# Altium PCB PCB_2021-02-06_18-04-57_2021-03-03.pcbdoc
Units mil, origin at the board's own origin, x right, y up, seen from the top; angles counter-clockwise.
Board outline 4600 x 3397 mil, 2 copper layers (Top Layer, Bottom Layer); 78 components, 121 nets, 480 pads, 290 vias.
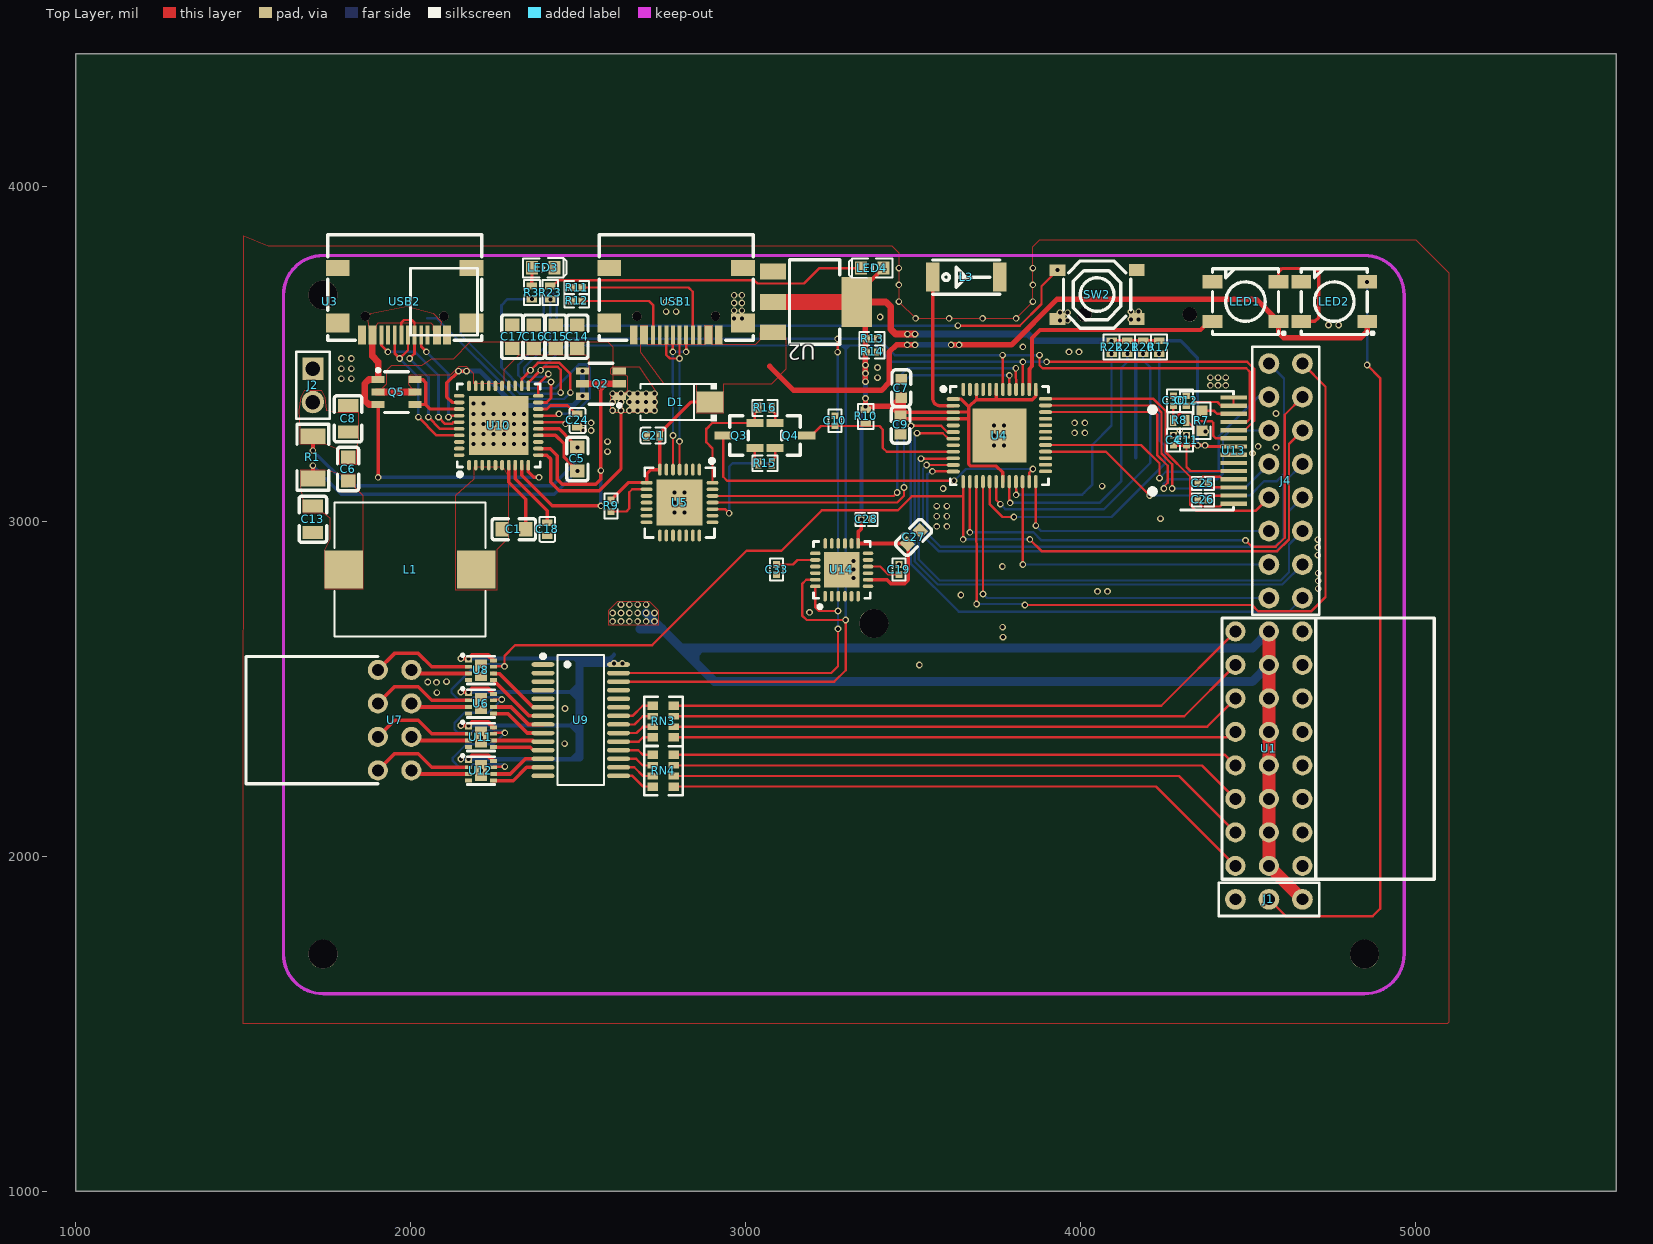
[diagram p0: Top Layer view]
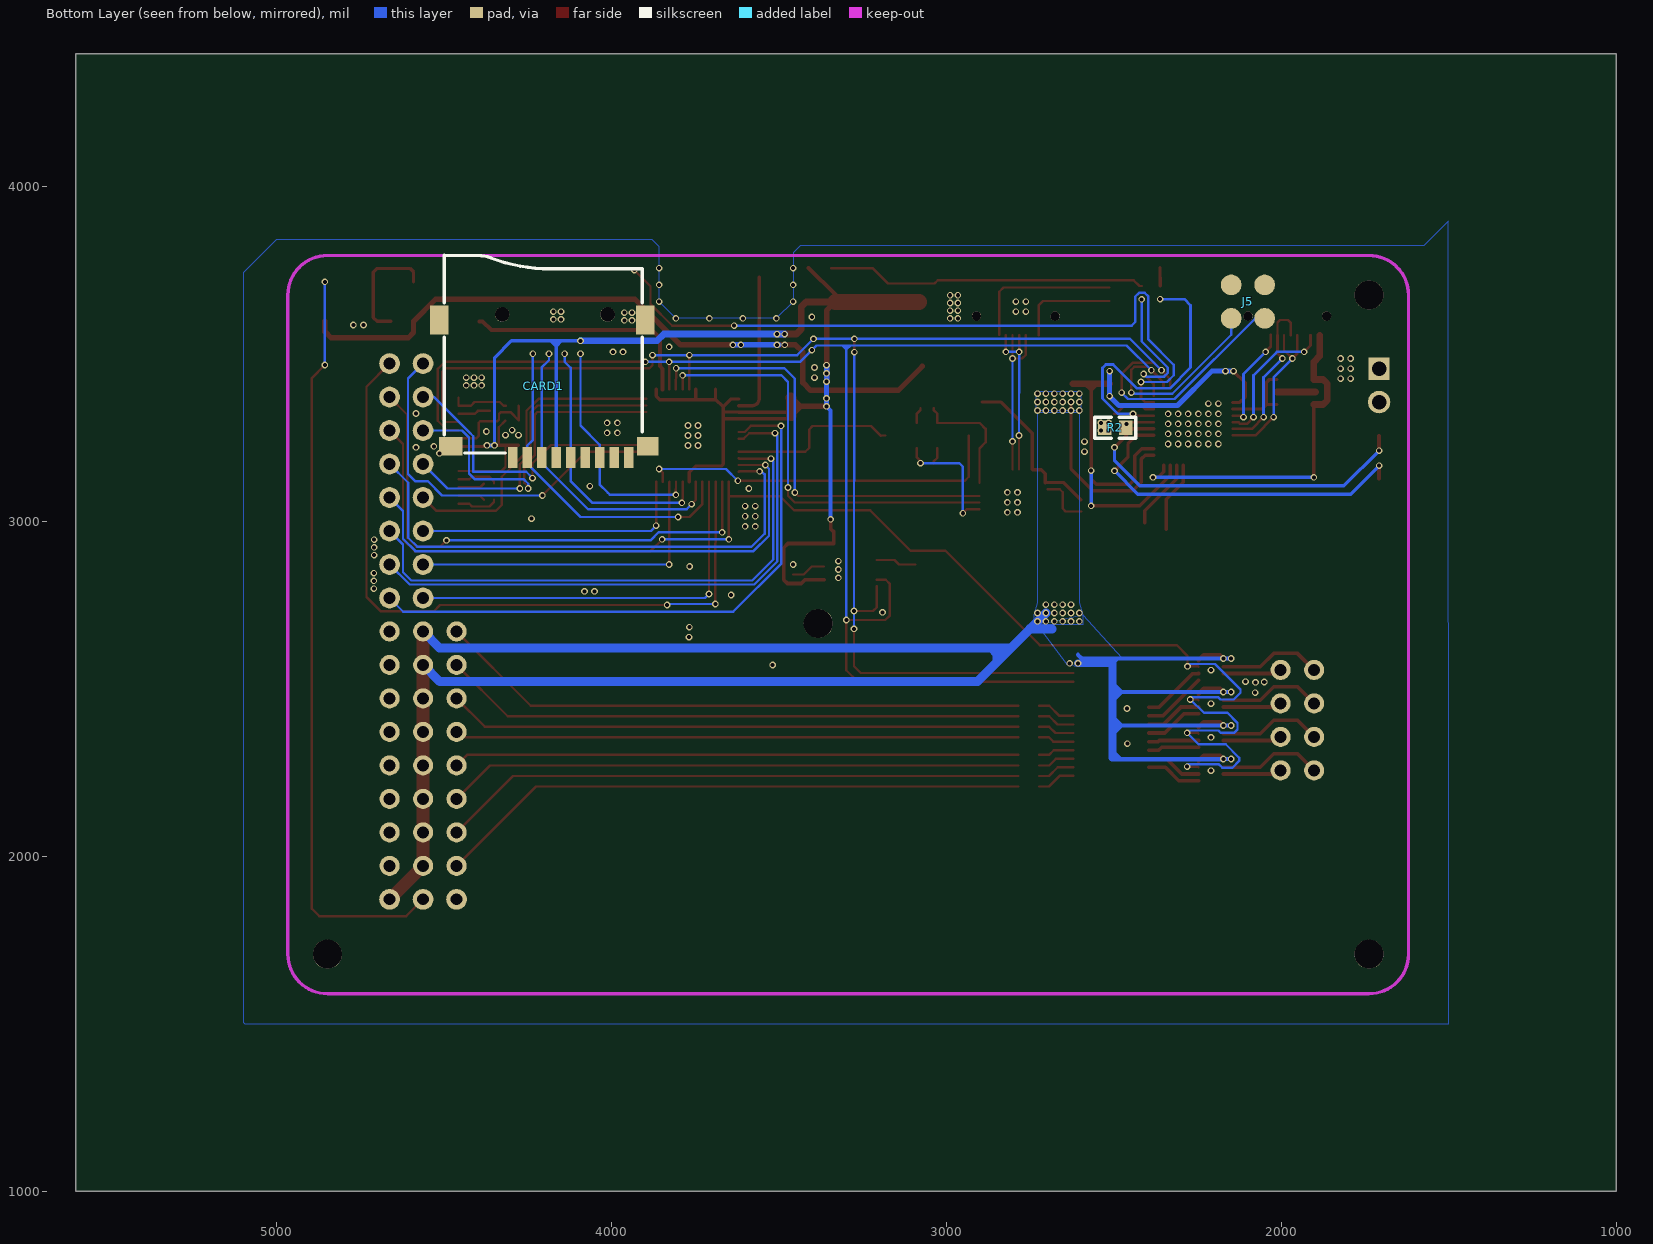
[diagram p1: Bottom Layer view, seen from below]

## Layer stack, top to bottom
Top Layer: signal copper (thickness not stored)
Dielectric: dielectric 12.6, FR-4, Dk 4.8
Bottom Layer: signal copper (thickness not stored)

## Board outline
5600,1000 1000,1000 1000,4397 5600,4397

## Components (designator, comment, footprint, x,y, rotation, side; value= is the part's Value field where it differs from the comment)
C1 "0.1u" C0603#1 2308,2977 r180 top
C4 "0.1uF" C0402#1 4278,3243 r90 top
C5 "10u" C0603#1 2498,3187 r270 top
C6 "0.1u" C0603#1 1813,3157 r270 top
C7 "0.1uF" C0603#2 3465,3398 r270 top
C8 "22u" C0805 1813,3307 r270 top
C9 "10uF" C0603#2 3463,3289 r90 top
C10 "0.1uF" C0402#1 3267,3301 r270 top
C11 "10μF/16V" C0402#1 4317,3243 r90 top
C12 "10.μF/16V" C0402#1 4316,3361 r270 top
C13 "22u" C0805 1708,3007 r90 top
C14 "22uF" C0603#1 2498,3552 r270 top
C15 "22uF" C0603#1 2433,3552 r270 top
C16 "22uF" C0603#1 2368,3552 r270 top
C17 "22uF" C0603#1 2303,3552 r270 top
C18 "1uF" C0402#2 2408,2977 r270 top
C19 "100nF" C0402#1 3458,2857 r90 top
C21 "10uF" C0402#2 2724,3257 r0 top
C24 "1uF" C0402#2 2498,3302 r270 top
C25 "1μF/50V" C0402#1 4366,3114 r0 top
C26 "1μF/50V" C0402#1 4366,3065 r180 top
C27 "100nF" C0603#2 3502,2953 r45 top
C28 "100nF" C0402#1 3361,3007 r180 top
C30 "4.7μF/16V" C0402#1 4278,3361 r270 top
C33 "2.2nF" C0402#1 3093,2857 r90 top
CARD1 "TF-15×15" TF-SMD_TF-15-15 4203,3397 r270 bottom
D1 "SS34_C83961" SMA_L4.4-W2.8-LS5.4-RD 2793,3357 r180 top
J1 "HDR-M-2.54_1x3" HDR-M-2.54_1X3 4563,1872 r0 top
J2 "HDR-M-2.54_1x2" HDR-M-2.54_1X2 1708,3407 r270 top
J4 "HDR-M-2.54_2x8" HDR-M-2.54_2X8 4613,3122 r90 top
J5 "HDR-M-2.54_2x2" HDR-M-2.54_2X2 2099.73,3657 r0 top
L1 "2.2uH" IND-SMD_L11.5-W10.0_SMMS1040 1998,2857 r180 top
L3 "AN2051-245" ANT2051 3659,3730 r0 top
LED1 "WS2812C" LED-SMD_4P-L5.0-W5.0-TL 4493,3657 r180 top
LED2 "WS2812C" LED-SMD_4P-L5.0-W5.0-TL 4758,3657 r180 top
LED3 "LED-0603_R" LED0603_RED 2396,3758 r0 top
LED4 "LED-0603_R" LED0603_RED 3378,3757 r180 top
Q2 "SC8205S" SOT-23-6_L2.9-W1.6-P0.95-LS2.8-BR 2568,3412 r0 top
Q3 "S8050" SOT-23_L2.9-W1.3-P0.95-LS2.4-BR 2980.5,3257 r0 top
Q4 "S8050" SOT-23_L2.9-W1.3-P0.95-LS2.4-BR 3135.5,3257 r180 top
Q5 "SC8205S" SOT-23-6_L2.9-W1.6-P0.95-LS2.8-BR 1958,3387 r180 top
R1 "5mR" R1206 1708,3192 r270 top
R2 "AT103" R0603#1 2496,3280 r0 bottom
R3 "2K" R0402#1 2362,3684 r270 top
R7 "910k/1%" R0603#2 4363,3301 r90 top
R8 "4.7k/1%" R0402#1 4297,3302 r0 top
R9 "10k" R0402#2 2598.5,3047.2 r270 top
R10 "10K" R0402#1 3359,3314 r90 top
R11 "5.1K" R0402#2 2496,3699 r180 top
R12 "5.1K" R0402#2 2496,3659 r180 top
R13 "4.7k" R0402#2 3378,3546 r0 top
R14 "4.7k" R0402#2 3378,3507 r0 top
R15 "10K" R0402#1 3058,3174.5 r180 top
R16 "10K" R0402#1 3058,3339.5 r0 top
R17 "10K" R0402#1 4235,3521 r270 top
R20 "10K" R0402#1 4187,3521 r270 top
R21 "10K" R0402#1 4140,3521 r270 top
R22 "10K" R0402#1 4093,3521 r270 top
R23 "2K" R0402#1 2417,3684 r270 top
RN3 "220" RES-ARRAY-SMD_0603-8P-L3.2-W1.6-BL 2754.11,2403.1 r270 top
RN4 "220" RES-ARRAY-SMD_0603-8P-L3.2-W1.6-BL 2754.11,2256.1 r270 top
SW2 "金属按键" SW-SMD_4P-L5.1-W5.1-P3.70-LS6.5 4050,3678 r0 top
U1 "3x8p弯针" 3X8P弯针 4463,1972 r90 top
U2 "AMS1117-3.3_C498117" PG-SOT223-4_L6.5-W3.5-P2.30-LS7.0-BR 3207,3656 r180 top
U3 "Raink边框" RAINK 1758,3657 r0 top
U4 "ESP32-PICO-D4" QFN-48_L7.0-W7.0-P0.50-BL-EP4.1 3758,3257 r270 top
U5 "CP2102-GMR" QFN-28_L5.0-W5.0-P0.50-BL-EP 2803,3057 r180 top
U6 "DRV8838DSGR" WSON-8_L2.0-W2.0-P0.50-TL-EP 2210,2456 r0 top
U7 "2x4p弯针" 2X4P弯针 2002,2557 r270 top
U8 "DRV8838DSGR" WSON-8_L2.0-W2.0-P0.50-TL-EP 2210,2556 r0 top
U9 "PCA9685" TSSOP-28_L9.7-W4.4-P0.65-LS6.4-BL 2508,2407 r270 top
U10 "SW6106" QFN-40_L6.0-W6.0-P0.50-BL-EP4.5 2263,3287 r0 top
U11 "DRV8838DSGR" WSON-8_L2.0-W2.0-P0.50-TL-EP 2210,2356 r0 top
U12 "DRV8838DSGR" WSON-8_L2.0-W2.0-P0.50-TL-EP 2210,2256 r0 top
U13 "SSD1306-14Pin_0.91_JX" SSD1306-14PIN_0.91_JX 4418,3212 r90 top
U14 "MPU-6050_C24112" QFN-24_L4.0-W4.0-P0.50-BL-EP2.6 3287,2856 r0 top
USB1 "TYPEC-304S-ACP16" USB-C-SMD_TYPEC-304S-ACP16 2793,3657 r180 top
USB2 "TYPEC-304S-ACP16" USB-C-SMD_TYPEC-304S-ACP16 1982,3657 r180 top

## Footprints (in the part's own frame and the unit in brackets; to place one, negate y for a bottom-side part, rotate by r counter-clockwise, add the part's x,y. Pads: shape width x height; smd on the part's side, far side on the other; paste and mask are expansions set on the pad)
2X4P弯针 [mil]
  round 60 hole 36: 1(0,0) 2(0,-100) 3(100,0) 4(100,-100) 5(200,0) 6(200,-100) 7(300,0) 8(300,-100)
  silkscreen extent -40,-494 340,-100
3X8P弯针 [mil]
  round 60 hole 36: 1(0,0) 2(0,-100) 3(0,-200) 4(100,0) 5(100,-100) 6(100,-200) 7(200,0) 8(200,-100) 9(200,-200) 10(300,0) 11(300,-100) 12(300,-200) 13(400,0) 14(400,-100) 15(400,-200) 16(500,0) 17(500,-100) 18(500,-200) 19(600,0) 20(600,-100) 21(600,-200) 22(700,0) 23(700,-100) 24(700,-200)
  silkscreen extent -40,-594 740,40
ANT2051 [mm]
  rect 1x2.2 smd: 1(-2.54,0) 2(2.54,0)
  silkscreen extent -2.56,-1.3 2.55,1.3
C0402#1 [mm]
  rect 0.5x0.54 smd: 1(-0.381,0) 2(0.381,0)
  silkscreen extent -0.84,-0.48 0.84,0.5
C0402#2 [mm]
  rect 0.5x0.8 smd: 1(-0.5,0) 2(0.5,0)
  silkscreen extent -0.95,-0.6 0.95,0.6
C0603#1 [mm]
  rect 1x1.1 smd: 1(-0.9,0) 2(0.9,0)
  silkscreen extent -1.65,-0.8 1.65,0.8
C0603#2 [mm]
  rect 0.8x0.9 smd: 1(-0.7,0) 2(0.7,0)
  silkscreen extent -1.41,-0.71 1.39,0.72
C0805 [mm]
  rect 1x1.55 smd: 1(-1,0) 2(1,0)
  silkscreen extent -1.75,-1.04 1.75,1.04
HDR-M-2.54_1X2 [mm]
  rect 1.7x1.575 hole 1.1: 1(-1.27,0)
  round 1.7 hole 1.1: 2(1.27,0)
  silkscreen extent -2.54,-1.27 2.54,1.27
HDR-M-2.54_1X3 [mil]
  round 62 hole 35: 1(-100,0) 2(0,0) 3(100,0)
  silkscreen extent -150,-50 150,50
HDR-M-2.54_2X2 [mil]
  round 62 smd far side: 1(-50,50) 2(50,50) 3(-50,-50) 4(50,-50)
  silkscreen extent -100,-100 100,100
HDR-M-2.54_2X8 [mil]
  round 62 hole 35: 1(-350,-50) 2(-350,50) 3(-250,-50) 4(-250,50) 5(-150,-50) 6(-150,50) 7(-50,-50) 8(-50,50) 9(50,-50) 10(50,50) 11(150,-50) 12(150,50) 13(250,-50) 14(250,50) 15(350,-50) 16(350,50)
  silkscreen extent -400,-100 400,100
IND-SMD_L11.5-W10.0_SMMS1040 [mm]
  rect 2.924x2.92 smd: 1(5.028,0) 2(-5.028,0)
  silkscreen extent -5.73,-5.08 5.73,5.08
LED0603_RED [mm]
  rect 0.9x1 smd: 1(-0.85,0) 2(0.85,0)
  silkscreen extent -1.54,-0.73 1.75,0.73
LED-SMD_4P-L5.0-W5.0-TL [mm]
  rect 1.5x1 smd: 1(-2.5,1.5) 2(-2.5,-1.5) 3(2.5,-1.5) 4(2.5,1.5)
  silkscreen extent -3,-2.5 2.5,2.5
PG-SOT223-4_L6.5-W3.5-P2.30-LS7.0-BR [mm]
  rect 2x1.2 smd: 1(3.175,-2.3) 2(3.175,0) 3(3.175,2.3)
  rect 2.3x3.8 smd: 4(-3.175,0)
  silkscreen extent -1.87,-3.2 1.93,3.2
QFN-24_L4.0-W4.0-P0.50-BL-EP2.6 [mm]
  oval 0.28x0.8 smd: 1(-1.25,-2) 2(-0.75,-2) 3(-0.25,-2) 4(0.25,-2) 5(0.75,-2) 6(1.25,-2) 13(1.25,2) 14(0.75,2) 15(0.25,2) 16(-0.25,2) 17(-0.75,2) 18(-1.242,2)
  oval 0.8x0.28 smd: 7(2,-1.25) 8(2,-0.75) 9(2,-0.25) 10(2,0.25) 11(2,0.75) 12(2,1.25) 19(-2,1.25) 20(-2,0.75) 21(-2,0.25) 22(-2,-0.25) 23(-2,-0.75) 24(-2,-1.25)
  rect 2.7x2.7 smd: 25(0.013,0)
  silkscreen extent -2.14,-3.05 2.16,2.15
QFN-28_L5.0-W5.0-P0.50-BL-EP [mm]
  oval 0.28x0.9 smd: 1(-1.501,-2.5) 2(-1.001,-2.5) 3(-0.501,-2.5) 4(0,-2.5) 5(0.5,-2.5) 6(1.001,-2.5) 7(1.501,-2.5) 15(1.501,2.5) 16(1.001,2.5) 17(0.5,2.5) 18(0,2.5) 19(-0.501,2.5) 20(-1.001,2.5) 21(-1.501,2.5)
  oval 0.9x0.28 smd: 8(2.5,-1.501) 9(2.5,-1.001) 10(2.5,-0.5) 11(2.5,0) 12(2.5,0.5) 13(2.5,1.001) 14(2.5,1.501) 22(-2.5,1.501) 23(-2.5,1.001) 24(-2.5,0.5) 25(-2.5,0) 26(-2.5,-0.5) 27(-2.5,-1.001) 28(-2.5,-1.501)
  rect 3.5x3.5 smd: 29(0,0)
  silkscreen extent -2.65,-3.3 2.65,2.65
QFN-40_L6.0-W6.0-P0.50-BL-EP4.5 [mm]
  oval 0.28x0.8 smd: 1(-2.25,-3) 2(-1.75,-3) 3(-1.25,-3) 4(-0.75,-3) 5(-0.25,-3) 6(0.25,-3) 7(0.75,-3) 8(1.25,-3) 9(1.75,-3) 10(2.25,-3) 21(2.25,3) 22(1.75,3) 23(1.25,3) 24(0.75,3) 25(0.25,3) 26(-0.25,3) 27(-0.75,3) 28(-1.25,3) 29(-1.75,3) 30(-2.25,3)
  oval 0.8x0.28 smd: 11(3,-2.25) 12(3,-1.75) 13(3,-1.25) 14(3,-0.75) 15(3,-0.25) 16(3,0.25) 17(3,0.75) 18(3,1.25) 19(3,1.75) 20(3,2.25) 31(-3,2.25) 32(-3,1.75) 33(-3,1.25) 34(-3,0.75) 35(-3,0.25) 36(-3,-0.25) 37(-3,-0.75) 38(-3,-1.25) 39(-3,-1.75) 40(-3,-2.25)
  rect 4.5x4.5 smd: 41(0,0)
  silkscreen extent -3.15,-3.85 3.15,3.15
QFN-48_L7.0-W7.0-P0.50-BL-EP4.1 [mm]
  oval 0.28x1 smd: 1(-2.769,-3.5) 2(-2.268,-3.5) 3(-1.768,-3.5) 4(-1.268,-3.5) 5(-0.767,-3.5) 6(-0.267,-3.5) 7(0.231,-3.5) 8(0.731,-3.5) 9(1.232,-3.5) 10(1.732,-3.5) 11(2.233,-3.5) 12(2.733,-3.5) 25(2.718,3.5) 26(2.217,3.5) 27(1.717,3.5) 28(1.217,3.5) 29(0.716,3.5) 30(0.216,3.5) 31(-0.282,3.5) 32(-0.782,3.5) 33(-1.283,3.5) 34(-1.783,3.5) 35(-2.284,3.5) 36(-2.784,3.5)
  oval 1x0.28 smd: 13(3.5,-2.743) 14(3.5,-2.243) 15(3.5,-1.742) 16(3.5,-1.242) 17(3.5,-0.742) 18(3.5,-0.241) 19(3.5,0.257) 20(3.5,0.757) 21(3.5,1.257) 22(3.5,1.758) 23(3.5,2.258) 24(3.5,2.759) 37(-3.5,2.769) 38(-3.5,2.268) 39(-3.5,1.768) 40(-3.5,1.268) 41(-3.5,0.767) 42(-3.5,0.267) 43(-3.5,-0.231) 44(-3.5,-0.731) 45(-3.5,-1.232) 46(-3.5,-1.732) 47(-3.5,-2.233) 48(-3.5,-2.733)
  rect 4.1x4.1 smd: 49(0,0)
  silkscreen extent -3.73,-4.4 3.72,3.73
R0402#1 [mm]
  rect 0.5x0.8 smd: 1(-0.5,0) 2(0.5,0)
  silkscreen extent -0.95,-0.6 0.95,0.6
R0402#2 [mm]
  rect 0.566x0.54 smd: 1(-0.433,0) 2(0.433,0)
  silkscreen extent -0.94,-0.5 0.94,0.5
R0603#1 [mm]
  rect 1x1.1 smd: 1(0.8,0) 2(-0.8,0)
  silkscreen extent -1.55,-0.81 1.55,0.8
R0603#2 [mm]
  rect 0.806x0.864 smd: 1(-0.753,0) 2(0.753,0)
  silkscreen extent -1.39,-0.66 1.39,0.66
R1206 [mm]
  rect 1.2x1.9 smd: 1(-1.6,0) 2(1.6,0)
  silkscreen extent -2.5,-1.2 2.5,1.2
RAINK [mil]
  Keep-Out Layer lines w10: -137.8,-1948.82 -137.8,19.68 ; -19.68,-2066.93 3090.55,-2066.93 ; -19.68,137.8 3090.55,137.8 ; 3208.66,-1948.82 3208.66,19.68
  Keep-Out Layer lines w10: -137.8,-1948.82 ccw(c-19.69,-1948.82) -19.68,-2066.93 ; -137.8,19.68 cw(c-19.69,19.68) -19.68,137.79 ; 3090.55,-2066.93 ccw(c3090.55,-1948.82) 3208.66,-1948.82 ; 3090.55,137.8 cw(c3090.55,19.68) 3208.66,19.68
RES-ARRAY-SMD_0603-8P-L3.2-W1.6-BL [mm]
  rect 0.65x0.8 smd: 1(-1.2,-0.8) 4(1.2,-0.8) 5(1.2,0.8) 8(-1.2,0.8)
  rect 0.5x0.8 smd: 2(-0.4,-0.8) 3(0.4,-0.8) 6(0.4,0.8) 7(-0.4,0.8)
  silkscreen extent -1.87,-1.45 1.87,1.47
SMA_L4.4-W2.8-LS5.4-RD [mm]
  rect 2.046x1.62 smd: 1(-2.565,0) 2(2.565,0)
  silkscreen extent -3.08,-1.44 2.7,1.44
SOT-23-6_L2.9-W1.6-P0.95-LS2.8-BR [mm]
  rect 1x0.55 smd: 1(1.4,-0.95) 2(1.4,0) 3(1.4,0.95) 4(-1.4,0.95) 5(-1.4,0) 6(-1.4,-0.95)
  silkscreen extent -0.9,-1.78 1.52,1.55
SOT-23_L2.9-W1.3-P0.95-LS2.4-BR [mm]
  rect 1.3x0.6 smd: 1(1.2,-0.95) 2(1.2,0.95) 3(-1.2,0)
  silkscreen extent -0.7,-1.5 0.7,1.5
SSD1306-14PIN_0.91_JX [mm]
  rect 0.32x2 smd: 1(-4.03,-1) 2(-3.41,-1) 3(-2.79,-1) 4(-2.17,-1) 5(-1.55,-1) 6(-0.93,-1) 7(-0.31,-1) 8(0.31,-1) 9(0.93,-1) 10(1.55,-1) 11(2.17,-1) 12(2.79,-1) 13(3.41,-1) 14(4.03,-1)
  silkscreen extent -4.5,-1 4.5,5.35
SW-SMD_4P-L5.1-W5.1-P3.70-LS6.5 [mm]
  rect 1.2x0.9 smd: 1(-3,1.849) 2(3,1.85) 3(-3,-1.85) 4(3,-1.85)
  silkscreen extent -2.55,-2.55 2.55,2.55
TF-SMD_TF-15-15 [mil]
  rect 63x27.6 smd: 1(205.77,-92.52) 2(205.77,-49.21) 3(205.77,-5.91) 4(205.77,37.4) 5(205.77,80.71) 6(205.77,124.01) 7(205.77,167.32) 8(205.77,210.63) 9(205.77,253.94)
  rect 55.1x63 smd: 10(172.19,311.02)
  rect 86.6x55.1 smd: 11(-205.77,303.15) 12(-205.77,-311.02)
  rect 55.1x70.9 smd: 13(172.17,-277.58)
  round 43.31 hole 43.31 unplated: ""(-221.51,-124.02) ""(-221.51,190.94)
  silkscreen extent -399,-297 192,294
TSSOP-28_L9.7-W4.4-P0.65-LS6.4-BL [mm]
  oval 0.343x1.731 smd: 1(-4.225,-2.866) 2(-3.575,-2.866) 3(-2.925,-2.866) 4(-2.275,-2.866) 5(-1.625,-2.866) 6(-0.975,-2.866) 7(-0.325,-2.866) 8(0.325,-2.866) 9(0.975,-2.866) 10(1.625,-2.866) 11(2.275,-2.866) 12(2.925,-2.866) 13(3.575,-2.866) 14(4.225,-2.866) 15(4.225,2.866) 16(3.575,2.866) 17(2.925,2.866) 18(2.275,2.866) 19(1.625,2.866) 20(0.975,2.866) 21(0.325,2.866) 22(-0.325,2.866) 23(-0.975,2.866) 24(-1.625,2.866) 25(-2.275,2.866) 26(-2.925,2.866) 27(-3.575,2.866) 28(-4.225,2.866)
  silkscreen extent -5,-3.02 4.93,1.77
USB-C-SMD_TYPEC-304S-ACP16 [mm]
  rect 1.8x1.45 smd: 13(-5.07,1.632) 14(5.07,1.632)
  rect 1.8x1.2 smd: 15(-5.07,-2.548) 16(5.07,-2.548)
  rect 0.6x1.45 smd: A1B12(-3.225,2.547) A4B9(-2.45,2.547) B1A12(3.22,2.547) B4A9(2.45,2.547)
  rect 0.3x1.45 smd: A5(-1.26,2.532) A6(-0.25,2.547) A7(0.25,2.547) A8(1.25,2.547) B5(1.75,2.547) B6(0.75,2.547) B7(-0.75,2.547) B8(-1.75,2.547)
  round 0.7 hole 0.7 unplated: ""(-2.98,1.103) ""(2.98,1.103)
  silkscreen extent -5.84,-5.08 5.84,2.92
WSON-8_L2.0-W2.0-P0.50-TL-EP [mil]
  rect 20.5x11.5 smd: 1(-37.4,29.5) 2(-37.4,10.5) 3(-37.4,-9.5) 4(-37.4,-29.5) 5(37.4,-29.5) 6(37.4,-9.5) 7(37.4,10.5) 8(37.4,29.5)
  rect 35.5x63.5 smd: 9(0,0.5)
  silkscreen extent -58,-41 41,48

## Free pads (board coordinates)
  round 86.61 hole 86.61 unplated: ""(1738.31,1708.18) ""(1738.31,3676.68) ""(3383,2696) ""(4848.55,1708.18)

## Via types
v1: diameter 19.88, hole 12.01, Top Layer to Bottom Layer, 183 vias
v2: diameter 19.88, hole 12, Top Layer to Bottom Layer, 107 vias

## Nets (pads, with @x,y where several pads share a name; then routed paths per layer and width w, separated by ;. In a path a pad name is that pad's centre, name@x,y a point inside that pad or via, vN(x,y) a via of type N, cw(c..) or ccw(c..) an arc to the next point about the centre after c; other vN are vias at no path point)
BAT+: C5.1 C6.1 C8.2 J2.2 R1.1 U10.15 | length 1087.5
  Top Layer w10: U10.15 2443.28,3277.16 2481.59,3238.85 C5.1 v2(2498,3222)
  Top Layer w12: v1(1708,3212) R1.1
  Bottom Layer w10: v1(1708,3212) 1813,3107 2423,3107 2498,3182 v2(2498,3222)
C1_1: C1.1 U10.7 | length 213
  Top Layer w10: U10.7 2292.53,3117.47 2343.43,3066.57 C1.1
CARD1_10: CARD1.10
CC1: R11.1 USB1.A5 | length 463.9
  Top Layer w7: R11.1 2830,3699 2842.6,3686.4 USB1.A5
CC2: R12.1 USB1.B5 | length 306.3
  Top Layer w7: R12.1 2712,3659 2724.1,3646.9 USB1.B5
CP_RX: U4.41 U5.25 | length 1285.4
  Top Layer w7: U5.25 3453.01,3057.01 3473,3077 v1(3473,3102) ; v1(3788,3437) 3788,3395 U4.41
  Bottom Layer w7: v1(3473,3102) 3473,3417 3493,3437 v1(3788,3437)
CP_TX: U4.40 U5.26 | length 1325.9
  Top Layer w7: U5.26 3442.71,3076.71 v1(3453,3087) ; v1(3807,3458) U4.40
  Bottom Layer w7: v1(3453,3087) 3453,3427 3484,3458 v1(3807,3458)
DM_A: U10.38
DM_C: U10.36 USB2.A7 USB2.B7 | length 501.2
  Top Layer w7: USB2.A7 1972.16,3594.16 1980,3602 2004,3602 2011.53,3594.47 USB2.B7
  Top Layer w8: v2(1997,3487) 2011.5,3501.5 USB2.B7 ; v2(2053,3312) 2087.84,3277.16 U10.36
  Bottom Layer w8: v2(1997,3487) 2053,3431 v2(2053,3312)
DP_A: U10.39
DP_C: U10.37 USB2.A6 USB2.B6 | length 498.4
  Top Layer w7: v2(1967,3487) 1991.84,3511.84 USB2.A6
  Top Layer w8: USB2.B6 1952.47,3501.53 v2(1967,3487) ; v2(2023,3312) 2077.53,3257.47 U10.37
  Bottom Layer w8: v2(1967,3487) 2023,3431 v2(2023,3312)
DTR: Q3.2 R16.1 U5.28 | length 369.9
  Top Layer w7: U5.28 2901.4,3218.6 2883,3237 2883,3277 2900.4,3294.4 Q3.2 3027.7,3322.7 3038.3,3333.3 R16.1
EN: C10.2 Q4.3 R10.1 U4.9 | length 513.4
  Top Layer w7: Q4.3 3196.7,3256.9 3225.4,3285.3 3400,3285.3 3410,3275.3 3410,3220 3421.5,3208.5 U4.9
FLASH_CLK: U4.31
FLASH_CS: U4.25
FLASH_SD0: U4.27
FLASH_SD1: U4.33
FLASH_SD2: U4.30
FLASH_SD3: U4.32
GATE_A: Q2.4 Q2.6 U10.32 | length 657.6
  Top Layer w10: U10.32 2124.1,3355.9 2108,3372 2108,3414.4 v2(2143,3449.4) v2(2166.52,3449.4)
  Bottom Layer w15: v2(2143,3449.4) v2(2166.52,3449.4) 2207.6,3449.4 2310,3347 2485.3,3347 v2(2512.88,3374.6) v2(2512.88,3449.4)
GATE_C: Q5.4 Q5.6 U10.33 | length 238.7
  Top Layer w10: Q5.4 2045.4,3349.6 ; Q5.6 2035.6,3424.4 2045.4,3414.6 2045.4,3349.6 ; U10.33 2058.79,3336.21 2045.4,3349.6
GND: C4.2 C7.1 C8.1 C9.1 C10.1 C11.2 C12.1 C13.1 C14.1 C15.1 C16.1 C17.1 C18.2 C19.2 C21.1 C24.2 C27.2 C28.1 C30.1 C33.1 CARD1.6 CARD1.9 CARD1.11 CARD1.12 CARD1.13 J1.1 J2.1 J5.2 LED1.3 LED2.3 LED3.2 R2.1 R7.1 R11.2 R12.2 SW2.3 SW2.4 U1.3 U1.6 U1.9 U1.12 U1.15 U1.18 U1.21 U1.24 U2.1 U4.49 U5.3 U5.29 U6.4 U6.9 U8.4 U8.9 U9.1 U9.2 U9.3 U9.4 U9.5 U9.14 U9.24 U9.25 U10.13 U10.24 U10.41 U11.4 U11.9 U12.4 U12.9 U13.7 U14.1 U14.9 U14.11 U14.18 U14.25 USB1.13 USB1.14 USB1.15 USB1.16 USB1.A1B12 USB1.B1A12 USB2.13 USB2.14 USB2.15 USB2.16 USB2.A1B12 USB2.B1A12
  other v1: 2210,2256.5 2460,2337 2210,2356 2461,2442 2210,2456.5 2078,2489 2077,2520 2051,2521 2107,2522 2210,2556.5 3519,2572 3191,2729 3643,2781 4710,2800 4710,2823 3323,2832 4710,2846 3323,2857 3767,2866 3458,2872 3323,2882 4709,2900 4709,2923 4709,2946 4239,3009 3590,3099 4065,3106 4514,3204 4584,3222 4531,3225 4278,3258 4317,3258 4374,3269 2516,3272 2539,3272 4297,3273 2516,3295 2539,3295 4584,3323 4388,3407 4411,3407 4434,3407 4388,3430 4411,3430 4434,3430 3939,3601 3962,3601 4151,3604 4174,3604 2966,3607 2989,3607 3939,3624 3962,3624 4151,3627 4174,3627 2966,3630 2989,3630 2966,3653 2989,3653 2966,3676 2989,3676
  other v2: 3769,2655 3768,2685 4051,2792 4081,2792 3571,2986 3601,2986 3571,3016 3601,3016 2788,3027.5 2818,3027.5 3571,3046 3601,3046 2788,3057.5 2818,3057.5 2788,3087.5 2818,3087.5 2588,3209 3742,3227.22 3772,3227.22 2188,3232 2218,3232 2248,3232 2278,3232 2308,3232 2338,3232 2588,3239 3742,3257.22 3772,3257.22 2188,3262 2218,3262 2248,3262 2278,3262 2308,3262 2338,3262 3983,3265 4013,3265 3742,3287.22 3772,3287.22 2188,3292 2218,3292 2248,3292 2278,3292 2308,3292 2338,3292 3983,3295 4013,3295 2188,3322 2218,3322 2248,3322 2278,3322 2308,3322 2338,3322 2188,3352 2218,3352 1793,3427 1823,3427 3394,3430 1793,3457 1823,3457 3394,3460 1793,3487 1823,3487 3966,3507 3996,3507 3828,3522 4741,3587 4771,3587 3508,3607 3608,3607 3708,3607 3808,3607 3402,3611 2763,3627 2793,3627 2763,3657 2793,3657 3458,3657 3858,3657 3458,3707 3858,3707 3458,3757 3858,3757
GPIO0: Q3.3 U4.23 | length 1109.7
  Top Layer w7: Q3.3 2933.3,3133.7 2945,3122 v1(3623,3122) ; U4.23 3846.91,3145.91 v1(3858,3157)
  Bottom Layer w7: v1(3623,3122) 3658,3157 v1(3858,3157)
GPIO2: J4.4 U4.22 | length 982.5
  Top Layer w7: U4.22 3828,3118.41 v1(3828,2872)
  Bottom Layer w7: v1(3828,2872) 3846,2872 J4.4
GPIO4: J4.6 U4.24 | length 834
  Top Layer w7: U4.24@3866.61,3119 3867,3118.81 v1(3867,2987.71)
  Bottom Layer w7: v1(3867,2987.71) 3882.7,2972 J4.6
GPIO5: J4.12 U4.34 | length 1031.9
  Top Layer w7: U4.34 4221.8,3327.2 4229,3320 4229,3198.9 4261,3166.9 4261,3116 4249,3104 v1(4249,3099)
  Bottom Layer w7: v1(4249,3099) 4249,3113 4263,3127 4409,3127 4426,3144 4426,3251 4447,3272 J4.12
GPIO9: J4.16 U4.28 | length 1141.7
  Top Layer w7: U4.28 4075.89,3209.11 v1(4207,3078)
  Bottom Layer w7: v1(4207,3078) 4506,3078 4549,3121 4587,3121 4608,3142 4608,3427 J4.16
GPIO10: J4.14 U4.29 | length 896.2
  Top Layer w7: U4.29 4181.2,3228.8 4236,3174 v1(4236,3130)
  Bottom Layer w7: v1(4236,3130) 4255,3149 4413,3149 4413,3255 4426,3268 4530,3372 J4.14
GPIO12: CARD1.3 R20.2 U4.18 | length 918.5
  Top Layer w7: U4.18 3748.51,3064.49 v1(3761,3052)
  Bottom Layer w7: v1(3761,3052) 3776,3037 4070,3037 4208.9,3175.9 CARD1.3 4208.9,3460.1 4187,3482 v1(4187,3501.31)
GPIO13: CARD1.5 R21.2 U4.20 | length 810.8
  Top Layer w7: U4.20 3787.8,3058.2 v1(3790,3056)
  Bottom Layer w7: v1(3790,3056) 4057,3056 4122.29,3121.29 CARD1.5 ; CARD1.5 4122.3,3459.3 4140,3477 v1(4140,3501.31)
GPIO14: CARD1.2 R17.2 U4.17 | length 1007.4
  Top Layer w7: U4.17 3728.81,3052.19 3758,3023 3767,3014 v1(3801,3014)
  Bottom Layer w7: v1(3801,3014) 4093,3014 4252.21,3173.21 CARD1.2 ; v1(4235,3501.31) 4235,3244 4252.2,3226.8 CARD1.2
GPIO15: CARD1.7 R22.2 U4.21 | length 694
  Top Layer w7: U4.21 v1(3808,3080)
  Bottom Layer w7: v1(3808,3080) 4005,3080 4011,3086 4035.68,3110.68 CARD1.7 ; CARD1.7 4035.7,3229.7 4093,3287 v1(4093,3501.31)
GPIO18: J4.10 U4.35 | length 914.4
  Top Layer w7: U4.35 4221.1,3346.9 4242,3326 4242,3203 4274,3171 v1(4274,3099)
  Bottom Layer w7: v1(4274,3099) 4490,3099 J4.10
GPIO19: LED1.4 U4.38 | length 716.1
  Top Layer w12: U4.38 3847.3,3455.3 3856,3464 3856,3548 3880,3572 4359,3572 4384.9,3597.9 LED1.4
GPIO21: J5.3 R13.2 U4.42 U9.27 U10.22 U13.11 U14.24 | length 5107.8
  Top Layer w7: v2(2358,3452) 2380,3474 2444,3474 2477,3441 v1(2477,3385) ; U9.27 3255.7,2547.7 3276,2568 v1(3276,2680) ; U14.24 3208.3,2743.7 3219,2733 v1(3276,2733) ; v1(3275,3506) v1(3274.98,3546) ; v1(3768,3497) 3768,3395.29 U4.42 ; v1(3878,3497) 3878,3467 3887,3458 4495,3458 4506,3447 4506,3307 4496.4,3297.4 U13.11
  Top Layer w8: U10.22 2331.9,3425.9 v2(2358,3452)
  Bottom Layer w7: J5.3 2078,3607 2319,3366 2458,3366 v1(2477,3385) ; v2(2358,3452) 2452,3546 v1(3274.98,3546) v1(3397,3546) 3446,3497 v1(3768,3497) v1(3878,3497) ; v1(3275,3506) v1(3276,2733) v1(3276,2680)
GPIO22: J5.4 R14.2 U4.39 U9.26 U10.21 U13.10 U14.23 | length 5091.1
  Top Layer w7: v2(2388,3452) 2398,3462 2439,3462 2448,3453 v1(2448,3385) ; U9.26 3265.2,2522.2 3299,2556 v1(3299,2706) 3183,2706 3169,2720 3169,2814 3181.5,2826.5 U14.23 ; U4.39 3828,3395.19 v1(3828,3477) ; v1(3899,3477) 4498,3477 4519,3456 4519,3301 4491,3273 U13.10
  Top Layer w8: U10.21 2351.6,3415.6 v2(2388,3452)
  Bottom Layer w7: J5.4 2149.73,3558.27 2326,3382 2445,3382 v1(2448,3385) ; v2(2388,3452) 2462,3526 3298.98,3526 ; 3286.8,3526 3299,3513.8 3310.9,3526 ; v1(3299,2706) 3299,3526 ; v1(3899,3477) v1(3828,3477) 3437,3477 3388,3526 3298.98,3526
  other v1: 3402,3512
GPIO23: J4.8 U4.36 | length 943.6
  Top Layer w7: U4.36 4218.4,3366.6 4254,3331 4254,3208 4328,3134 4328,3050 4346,3032 4523,3032 J4.8
GPIO25: J4.13 U4.14 | length 1562.4
  Top Layer w7: v1(3669.71,2968) U4.14 ; v1(4493,2944) 4512,2925 4583,2925 4610,2952 4610,3319 J4.13
  Bottom Layer w7: v1(3669.71,2968) 3860,2968 3884,2944 v1(4493,2944)
GPIO26: J4.15 U4.15 | length 2159.7
  Top Layer w7: U4.15 v1(3690,2754) ; v1(3834,2751) 4512,2751 4531,2732 4689,2732 4732,2775 4732,3403 J4.15
  Bottom Layer w7: v1(3690,2754) 3831,2754 v1(3834,2751)
GPIO27: J4.2 U4.16 | length 1194.2
  Top Layer w7: v1(3709,2784) U4.16
  Bottom Layer w7: v1(3709,2784) 3721,2772 J4.2
GPIO32: J4.9 U4.12 | length 1592.7
  Top Layer w7: v1(3558,3150) 3619.61,3150 U4.12
  Bottom Layer w7: v1(3558,3150) 3552,3150 3543,3141 3543,2964 3582,2925 4580,2925 4607,2952 4607,3116 J4.9
GPIO33: J4.11 U4.13 U6.7 U8.7 U11.7 U12.7 | length 4327.3
  Top Layer w7: U12.7 2248.9,2268 v1(2281,2268) ; U11.7 2249.9,2369 v1(2281,2369) ; U6.7 2249.9,2469 v1(2272,2469) ; U8.7 2248.9,2568 v1(2280,2568) 2280,2599 2312,2631 2721,2631 3003,2913 3107,2913 3228,3034 3455,3034 3496.7,3075.7 3650,3075.7 ; v1(3650,2947) U4.13 ; v1(3849,2947) 3884,2912 4588,2912 4623,2947 4623,3232 J4.11
  Bottom Layer w7: v1(2280,2568) 2273,2575 2198,2575 2122,2499 2122,2489 2142,2469 2182,2469 2188,2475 2266,2475 v1(2272,2469) 2231,2429 2161,2429 2131,2399 2131,2379 2141,2369 2181,2369 2188,2376 2274,2376 v1(2281,2369) 2247,2335 2166,2335 2126,2295 2126,2285 2146,2265 2176,2265 2186,2275 2281,2275 v1(2281,2268) ; v1(3650,2947) v1(3849,2947)
GPIO34: J4.5 U4.10 | length 1682.3
  Top Layer w7: v1(3524,3188) 3619.41,3188 U4.10
  Bottom Layer w7: v1(3524,3188) 3517.2,3181.2 3517.2,2886.8 3580,2824 4598,2824 4623,2849 4623,2932 J4.5
GPIO35: J4.7 U4.11 | length 1561.8
  Top Layer w7: v1(3541,3169) 3620.1,3169 U4.11
  Bottom Layer w7: v1(3541,3169) 3530,3158 3530,2958 3576,2912 4586,2912 4623,2949 4623,3032 J4.7
GPIO37: J4.1 U4.6 | length 1791.9
  Top Layer w7: v1(3494,3286) 3584,3286 3602.5,3267.5 U4.6
  Bottom Layer w7: v1(3494,3286) 3493,3285 3493,2875 3637,2731 4622,2731 J4.1
GPIO38: J4.3 U4.7 | length 1712.1
  Top Layer w7: v1(3512,3264) 3589,3264 3605.1,3247.9 U4.7
  Bottom Layer w7: v1(3512,3264) 3505.1,3257.1 3505.1,2880.9 3574,2812 4603,2812 J4.3
IN_1A: U8.5 U9.7 | length 192
  Top Layer w11: U8.5 2354.1,2419.8 U9.7
IN_1B: U8.6 U9.6 | length 189.7
  Top Layer w11: U8.6 2248.51,2545.39 2265.18,2545.39 2365.18,2445.39 U9.6
IN_2A: U6.5 U9.9 | length 171.8
  Top Layer w11: U6.5 2290.5,2426.5 2348.4,2368.6 U9.9
IN_2B: U6.6 U9.8 | length 169.5
  Top Layer w11: U6.6 2299.5,2446.5 2351.8,2394.2 U9.8
IN_3A: U9.10 U11.6 | length 149.2
  Top Layer w11: U11.6 2364.5,2346.5 2368,2343 U9.10
IN_3B: U9.11 U11.5 | length 151.5
  Top Layer w11: U11.5 2357.4,2326.5 2366.47,2317.43 U9.11
IN_4A: U9.12 U12.6 | length 166.6
  Top Layer w11: U12.6 2297.5,2246.5 2342.84,2291.84 U9.12
IN_4B: U9.13 U12.5 | length 164.3
  Top Layer w11: U12.5 2306.5,2226.5 2346.2,2266.3 U9.13
L1_1: C5.2 C6.2 C13.2 L1.1 R1.2 U10.14 | length 1076.5
  Top Layer w10: U10.14 2432.5,3257.5 2458,3232 2458,3191.6 v2(2498,3151.56)
  Top Layer w12: R1.2 v2(1708,3167)
  Bottom Layer w10: v2(1708,3167) 1793,3082 2428.4,3082 v2(2498,3151.56)
L1_2: C1.2 L1.2 U10.2 U10.3 U10.4 U10.5 U10.6
L3_2: L3.2
LED1_2: LED1.2 LED2.4 | length 350.2
  Top Layer w10: LED1.2@4591.4,3716.1 4591.4,3745.4 4602,3756 4700,3756 4711.4,3744.6 4711.4,3609.4 4700,3597.9 LED2.4
LED2_2: J1.2 LED2.2 | length 2249.9
  Top Layer w7: J1.2 4613,1822 4873,1822 4895,1844 4895,3429 v1(4856.5,3467.5)
  Bottom Layer w7: v1(4856.4,3716.1) v1(4856.5,3467.5)
LIGHT: R23.2 U10.20 | length 410
  Top Layer w8: U10.20 2381.1,3411.1 v2(2411,3441)
  Bottom Layer w7: v2(2411,3441) 2403,3433 2350,3433 2339,3444 2339,3460 2417,3538 v1(2417,3664)
PWM_1: RN4.4 U9.15 | length 115
  Top Layer w7: U9.15 2662.3,2240.7 2694.1,2208.9 RN4.4
PWM_1_O: RN4.5 U1.1 | length 1775.5
  Top Layer w7: RN4.5 4226.1,2208.9 U1.1
PWM_2: RN4.3 U9.16 | length 112.6
  Top Layer w7: U9.16 2667.8,2266.3 2693.6,2240.4 RN4.3
PWM_2_O: RN4.6 U1.4 | length 1747.2
  Top Layer w7: RN4.6 4294.6,2240.4 U1.4
PWM_3: RN4.2 U9.17 | length 110
  Top Layer w7: U9.17 2673.2,2291.8 2693.2,2271.9 RN4.2
PWM_3_O: RN4.7 U1.7 | length 1718.8
  Top Layer w7: RN4.7 4363.1,2271.9 U1.7
PWM_4: RN4.1 U9.18 | length 107.6
  Top Layer w7: U9.18 2679.6,2317.4 2693.7,2303.3 RN4.1
PWM_4_O: RN4.8 U1.10 | length 1690.4
  Top Layer w7: RN4.8 4431.7,2303.3 U1.10
PWM_5: RN3.4 U9.19 | length 107.1
  Top Layer w7: U9.19 2681,2343 2693.9,2355.9 RN3.4
PWM_5_O: RN3.5 U1.13 | length 1684.1
  Top Layer w7: RN3.5 4446.86,2355.86 U1.13
PWM_6: RN3.3 U9.20 | length 109.6
  Top Layer w7: U9.20 2674.6,2368.6 2693.4,2387.4 RN3.3
PWM_6_O: RN3.6 U1.16 | length 1712.5
  Top Layer w7: RN3.6 4378.35,2387.35 U1.16
PWM_7: RN3.2 U9.21 | length 112
  Top Layer w7: U9.21 2668.2,2394.2 2692.9,2418.9 RN3.2
PWM_7_O: RN3.7 U1.19 | length 1740.8
  Top Layer w7: RN3.7 4309.85,2418.85 U1.19
PWM_8: RN3.1 U9.22 | length 114.4
  Top Layer w7: U9.22 2662.8,2419.8 2693.3,2450.3 RN3.1
PWM_8_O: RN3.8 U1.22 | length 1769.2
  Top Layer w7: RN3.8 4241.3,2450.3 U1.22
Q3_1: Q3.1 R15.2 | length 49.5
  Top Layer w7: Q3.1 3027.7,3190.3 3038.3,3179.7 R15.2
Q4_1: Q4.1 R16.2 | length 49.5
  Top Layer w7: R16.2 3077.7,3333.3 3088.3,3322.7 Q4.1
R3_1: LED3.1 R3.1 | length 54.3
  Top Layer w10: R3.1 LED3.1
R9_2: R9.2 U5.9 | length 155.8
  Top Layer w7: R9.2@2597.6,3030.3 2644.2,3030.3 2652.9,3039 2652.9,3087.9 2661.8,3096.9 U5.9@2697.1,3096.4
R23_1: LED4.2 R23.1 | length 957.9
  Top Layer w7: R23.1 2423.7,3703.7 2441,3721 3026,3721 3036,3711 3175,3711 3221,3757 LED4.2
RES#: C30.2 R8.1 U13.9 | length 299.4
  Top Layer w7: C30.2 4277.31,3345.31 R8.1 4302.3,3327 4330,3327 4336,3321 4336,3305 4341,3300 4392,3300 4397,3295 4397,3256 4404.38,3248.62 U13.9
RTS: Q4.2 R15.1 U5.24 | length 374.2
  Top Layer w7: U5.24 2938.69,3037.31 v1(2951,3025) ; v1(3077.7,3174.5) 3077.7,3180.7 3088.3,3191.3 Q4.2
  Bottom Layer w7: v1(2951,3025) 2951,3164 2961.5,3174.5 v1(3077.7,3174.5)
S$13728: 
SENSOR_VN: U4.8
SENSOR_VP: U4.5
SW2_2: SW2.2
SW_CC1: U10.34 USB2.A5 | length 312.8
  Top Layer w8: USB2.A5 2031.6,3522.4 v2(2047,3507) ; v2(2113,3312) 2117.53,3316.53 U10.34
  Bottom Layer w8: v2(2047,3507) 2113,3441 v2(2113,3312)
SW_CC2: U10.35 USB2.B5 | length 434.7
  Top Layer w8: USB2.B5 1913.1,3525.9 v2(1932,3507) ; v2(2083,3312) 2103,3292 2123,3292 2127.84,3296.84 U10.35
  Bottom Layer w8: v2(1932,3507) 2013,3507 2083,3437 v2(2083,3312)
U4_2: L3.1 U4.2 | length 435.9
  Top Layer w10: L3.1 3559,3368 ccw(c3581,3368) 3581,3346 3619.91,3346 ccw(c3619.91,3346.3) U4.2
U5_6: U5.6
U6_2: U6.2 U7.4 | length 307.7
  Top Layer w10.98: U7.4 1951.5,2506.5 2022.6,2506.5 2062.6,2466.5 U6.2
U6_3: U6.3 U7.3 | length 174.9
  Top Layer w10.98: U7.3 2012.5,2446.5 U6.3
U7_1: U7.1 U8.3 | length 174.9
  Top Layer w10.98: U7.1 2012.5,2546.5 U8.3
U7_2: U7.2 U8.2 | length 307.7
  Top Layer w10.98: U7.2 1951.5,2606.5 2022.6,2606.5 2062.6,2566.5 U8.2
U7_5: U7.5 U11.3 | length 174.9
  Top Layer w10.98: U7.5 2012.5,2346.5 U11.3
U7_6: U7.6 U11.2 | length 307.7
  Top Layer w10.98: U7.6 1951.5,2406.5 2022.6,2406.5 2062.6,2366.5 U11.2
U7_7: U7.7 U12.3 | length 174.9
  Top Layer w10.98: U7.7 2012.5,2246.5 U12.3
U7_8: U7.8 U12.2 | length 307.7
  Top Layer w10.98: U7.8 1951.5,2306.5 2022.6,2306.5 2062.6,2266.5 U12.2
U9_23: U9.23
U10_8: C18.1 U10.8 | length 211.9
  Top Layer w10: U10.8 2312.2,3127.8 2408,3032 C18.1
U10_16: R2.2 U10.16 | length 83.9
  Top Layer w8: U10.16 2458.16,3296.84 v2(2463,3292)
U10_17: R3.2 U10.17 | length 872
  Top Layer w8: U10.17 2437.5,3316.5 v2(2443,3322)
  Bottom Layer w8: v1(2362,3664.32) 2289.3,3664.3 2271,3646 2271,3460 2333,3398 2431,3398 2502,3469 2524,3469 2534,3459 2534,3368 2488,3322 v2(2443,3322)
U10_18: C24.1 U10.18 | length 131.9
  Top Layer w8: U10.18 2407.2,3336.2 2418,3347 2468,3347 2493.3,3321.7 C24.1
U10_19: SW2.1 U10.19 | length 2188.3
  Top Layer w7: v1(3634,3585) 3819,3585 3884,3650 3884,3702.91 v1(3931.89,3750.8)
  Top Layer w8: U10.19 2405.9,3355.9 2419,3369 v2(2419,3417)
  Bottom Layer w7: v2(2419,3417) 2341,3417 2321,3437 2321,3468 2397,3544 2397,3672 2408,3683 2425,3683 2436,3672 2436,3596 2447,3585 v1(3634,3585)
U13_1: C26.2 U13.1 | length 121.6
  Top Layer w7: C26.2 4351,3059 4365,3045 4417,3045 4425.34,3053.34 U13.1
U13_2: C26.1 U13.2 | length 81.6
  Top Layer w7: C26.1 4393.75,3077.75 U13.2
U13_3: C25.2 U13.3 | length 81.3
  Top Layer w7: C25.2 4392.84,3102.16 U13.3
U13_4: C25.1 U13.4 | length 121.2
  Top Layer w7: C25.1 4351,3120 4365,3134 4417,3134 4424.43,3126.57 U13.4
U13_12: R7.2 U13.12 | length 98
  Top Layer w7: R7.2 4399.34,3330.66 4408.17,3321.83 U13.12
U13_13: C12.2 U13.13 U13.14 | length 174.8
  Top Layer w7: C12.2 4323,3346 4334,3357 4409,3357 4419.75,3346.25 U13.13 U13.14
U14_10: C19.1 U14.10 | length 102.2
  Top Layer w7: U14.10 3402.2,2865.8 3426,2842 C19.1
U14_12: U14.12
U14_20: C33.2 U14.20 | length 120.9
  Top Layer w7: C33.2 3142,2872 3155.5,2885.5 U14.20
USB_PWR_DM: U5.5 USB1.A7 USB1.B7 | length 490.6
  Top Layer w7: v1(2783,3507) 2783,3556.55 USB1.A7 ; U5.5 v1(2783.3,3257) ; v1(2822.53,3507) USB1.B7
  Bottom Layer w7: v1(2783.3,3257) v1(2783,3507) v1(2822.53,3507)
USB_PWR_DP: U5.4 USB1.A6 USB1.B6 | length 504.1
  Top Layer w7: USB1.B6 2763.5,3497.5 2774,3487 v1(2802.8,3487) USB1.A6 ; U5.4 v1(2803,3239.5)
  Bottom Layer w7: v1(2802.8,3487) v1(2803,3239.5)
VBUS_A: D1.2 J1.3 J5.1 Q2.1 Q2.3 U1.2 U1.5 U1.8 U1.11 U1.14 U1.17 U1.20 U1.23 U6.1 U6.8 U8.1 U8.8 U9.28 U10.11 U11.1 U11.8 U12.1 U12.8 | length 7814
  Top Layer w10: U10.11 2406.6,3198.4 2418,3187 2418,3117 2443,3092 2563,3092 2628,3157 v1(2628,3357)
  Top Layer w12.98: v1(2150,2391) v1(2173,2391) 2183,2401 2231.9,2401 U11.8 ; v1(2150,2491) v1(2173,2491) 2183,2501 2231.9,2501 U6.8 ; v1(2150,2591) v1(2173,2591) 2183,2601 2231.9,2601 U8.8 ; v1(2173,2291) 2183,2301 2231.9,2301 U12.8
  Top Layer w37.09: U1.2 J1.3
  Top Layer w38.98: U1.2 U1.23
  Bottom Layer w12.98: v1(2150,2291) v1(2173,2291) ; v1(2150,2391) v1(2173,2391) 2504,2391.3 ; v1(2150,2491) v1(2173,2491) 2504,2491.3 ; v1(2150,2591) v1(2173,2591) 2596,2591 2607,2602 ; v1@2173,2290 2504,2290 ; 2478.1,2391.3 2504,2365.1 ; 2478.2,2391.3 2504,2417.7 ; 2478.5,2591 2490,2591 2504,2577 ; 2479.63,2290 2504,2314.37 ; 2504,2464.4 2477.4,2491.3 2504,2517.7
  Bottom Layer w22.98: 2504,2295 2504,2577 v1(2607,2577)
  Bottom Layer w26.98: 2685,2680 2749.9,2680.1 ; v1(2703,2727) 2807,2623 ; 2836.3,2593.7 2866.5,2623 ; 2848.84,2581.16 2848.84,2605.7 2854.51,2611.36 ; U1.20 4513,2522 2908,2522 2807,2623 ; U1.23 4514,2623 2807,2623
  other v1: 2632,2577 2603,2702 2628,2702 2653,2702 2678,2702 2703,2702 2728,2702 2603,2727 2628,2727 2653,2727 2678,2727 2728,2727 2628,2752 2653,2752 2678,2752 2703,2752 2603,3332 2628,3332 2653,3332 2678,3332 2703,3332 2728,3332 2603,3357 2653,3357 2678,3357 2703,3357 2728,3357 2603,3382 2628,3382 2653,3382 2678,3382 2703,3382 2728,3382
VBUS_C: Q5.1 Q5.3 U10.10 USB2.A4B9 USB2.B4A9 | length 1035.9
  Top Layer w10: Q5.3 1903,3349.48 v2(1903,3132) ; U10.10 2351.6,3148.4 2368,3132 v2(2383,3132)
  Top Layer w20: USB2.B4A9 1885.54,3494.22 1902.88,3476.88 Q5.1 1875.4,3424.4 1863,3412 1863,3362 1875.4,3349.6 Q5.3
  Bottom Layer w10: v2(1903,3132) v2(2383,3132)
VDD_3V3: C4.1 C7.2 C9.2 C11.1 C27.1 C28.2 CARD1.4 LED4.1 R8.2 R10.2 R13.1 R14.1 R17.1 R20.1 R21.1 R22.1 U2.2 U2.4 U4.1 U4.3 U4.4 U4.19 U4.37 U4.43 U4.46 U13.5 U13.8 U14.8 U14.13 | length 5346.5
  Top Layer w7: R8.2 4337,3281.68 4337,3228 ; C11.1 4317,3163 4329.02,3150.98 U13.5
  Top Layer w10: U4.1 3644,3366 3667,3343 ; 3667,3307 U4.4 3472.66,3306.9 C9.2 3473.04,3326.6 U4.3 3667,3327.4 ; U4.46 3689.8,3365.8 ; U4.43 3749,3364 ; U4.19 3768.1,3146.9 3749,3166 3673,3166 3667,3172 3667,3343 ; U4.37 3867.01,3375.01 3856,3364 3691.6,3364 3689.8,3365.8 ; R22.1 R17.1 ; C4.1 C11.1 v1(4349.47,3228) v1(4372,3228) 4375.76,3224.24 U13.8 ; 3667,3343 3689.8,3365.8
  Top Layer w11: v1(3346,3007) 3346,2979 3336.2,2969.2 U14.13 3473.3,2934.7 3486,2922 3486,2826 3475,2815 3434,2815 3422.5,2826.5 U14.8
  Top Layer w12: U2.4 3332,3677.53 LED4.1
  Top Layer w14: v1(3358,3344.04) v1(3358,3368.04)
  Top Layer w16: U2.4 3358,3630 v1(3358,3467) v1(3358,3418) ; v1(3358,3344.04) 3435.5,3344 C9.2 ; 3463,3344.03 3435.52,3344.04 3461.91,3370.44 C7.2
  Top Layer w20: U2.4 3419,3656 3434,3641 3434,3574 3448,3560 v1(3483.2,3560) v1(3506,3560)
  Top Layer w31: C9.2 3463,3368.44 C7.2
  Top Layer w47.24: U2.2 U2.4
  Bottom Layer w10: v1(4093,3540.01) 4150,3540 ; 4159.05,3530.48 4170.84,3530.48 4180.36,3540 ; CARD1.4 4165.6,3523.6 ; 4182.2,3540 4165.6,3523.6 ; v1(4349.47,3228) 4349.5,3489.5 4299,3540 4150,3540 ; 4150,3540 4165.6,3523.6
  Bottom Layer w12: v1(3346,3007) 3346,3032 3346,3332.04 v1(3358,3344.04)
  Bottom Layer w12.01: v1(4349.47,3228) v1(4372,3228)
  Bottom Layer w15: v1(3358,3344.04) v1(3358,3368.04) v1(3358,3418)
  Bottom Layer w16: v1(3358,3418) v1(3358,3467)
  Bottom Layer w20: v1(3483.2,3560) 3844,3560 3864,3540 v1(4093,3540.01)
  other v1: 3358,3443
VDD_5V: C21.2 D1.1 LED1.1 LED2.1 R9.1 U2.3 U5.7 U5.8 USB1.A4B9 USB1.B4A9 | length 2608.8
  Top Layer w10: R9.1@2599.3,3065 2650.7,3116.9 U5.8@2703.5,3116.7 ; U5.8@2704.64,3116.5 2704.64,3143.17 2716.67,3155.21 U5.7@2743.15,3155.21 ; U5.7 C21.2 2743.7,3263.7 2837,3357 D1.1
  Top Layer w16: 3072,3464 3144,3392 3406,3392 3429,3415 3429,3506 3451,3528 v1(3482.89,3528) 3500,3528 v1(3506,3528) ; v1(3614,3528) v1(3638.11,3528) 3794,3528 3930,3664 4525.3,3664 LED1.1 4591.4,3564.6 4607,3549 4838,3549 4856.4,3567.4 LED2.1
  Bottom Layer w16: v1@3500,3528 v1(3506,3528) v1(3638.11,3528)
VOUT: C14.2 C15.2 C16.2 C17.2 Q2.2 Q2.5 Q5.2 Q5.5 U10.9 U10.12 U10.25 U10.26 U10.27 U10.28 U10.29 | length 1255.7
  Top Layer w10: U10.9 2331.9,3138.1 2423,3047 v2(2568,3047) ; U10.12 2416.9,3218.1 2438,3197 2438,3127 2453,3112 2553,3112 2568,3127 2568,3412 ; 2547.8,3412 2568,3391.6 2588.3,3412
  Top Layer w20: Q5.2@1897.88,3387 Q5.5 ; Q2.5 Q2.2
  Bottom Layer w10: v2(2568,3047) v2(2568,3152)
pads on no net: CARD1. CARD1.1 CARD1.8 U4.26 U4.44 U4.45 U4.47 U4.48 U5.1 U5.2 U5.10 U5.11 U5.12 U5.13 U5.14 U5.15 U5.16 U5.17 U5.18 U5.19 U5.20 U5.21 U5.22 U5.23 U5.27 U10.1 U10.23 U10.30 U10.31 U10.40 U13.6 U14.2 U14.3 U14.4 U14.5 U14.6 U14.7 U14.14 U14.15 U14.16 U14.17 U14.19 U14.21 U14.22 USB1. USB1.A8 USB1.B8 USB2. USB2.A8 USB2.B8

## Polygon pours and split planes (outlines as drawn)
GND on Bottom Layer (solid): 1501,3897 1574,3824 3437,3824 3458,3803 3458,3757 3458,3657 3508,3607 3808,3607 3858,3657 3858,3821 3878,3841 5002,3841 5100,3743 5100,1505 5095,1500 1500,1500
VBUS_A on Bottom Layer (solid): 2593,2722 2476,2594 2610,2566 2638,2571 2729,2692
VBUS_A on Bottom Layer (solid): 2603,3332 2603,2757 2593,2722 2593,2692 2738,2692 2738,2722 2728,2757 2728,3332
VBUS_A on Bottom Layer (solid): 2597,3388 2734,3388 2734,3326 2597,3326
GND on Top Layer (solid): 1501,3853 1574,3824 3437,3824 3458,3803 3458,3757 3458,3657 3508,3607 3808,3607 3858,3657 3858,3821 3878,3841 5002,3841 5100,3743 5100,1505 5095,1500 1500,1500
VBUS_A on Top Layer (solid): 2591,2723 2591,2735 2618,2762 2713,2762 2740,2735 2740,2723 2740,2692 2739,2691 2591,2691
VDD_5V on Top Layer (solid): 2685,3585 2685,3508 2757,3410 2853,3412 2853,3325 2935,3325 2935,3412 3078,3412 3122,3456 3122,3549 3107,3564 3044,3564 3043,3563 3043,3542 3029,3528 2901,3528 2901,3585 2878,3585 2878,3528 2708,3528 2708,3585
VBUS_C on Top Layer (solid): 1877,3577 1872,3612 1882,3622 1989,3643 2067,3622 2092,3597 2087,3572 2067,3572 2067,3587 2062,3592 1902,3592 1897,3587 1897,3577
BAT+ on Top Layer (solid): 1670,3279 1668,3332 1673,3372 1683,3392 1733,3392 1743,3372 1748,3332 1783,3327 1843,3327 1844,3288 1843,3248 1837,3214 1837,3170 1788,3170 1788,3213 1746,3231 1670,3231
L1_1 on Top Layer (solid): 1835,3142 1791,3142 1745,3153 1670,3153 1670,3105 1677,3066 1677,3026 1739,3026 1758,3011 1758,2947 1742,2914 1743,2800 1858,2800 1858,3077 1835,3101
L1_2 on Top Layer (solid): 2188,3162 2188,3127 2133,3077 2133,2797 2258,2797 2258,2917 2293,2952 2293,3132 2278,3162
VBUS_A on Top Layer (solid): 2603,3462 2682,3462 2732,3389 2732,3325 2598,3325 2598,3382 2603,3387 2643,3387 2648,3392 2648,3432 2643,3437 2603,3437 2598,3442 2598,3457 2603,3462
VOUT on Top Layer (solid): 1913,3397 1928,3412 1928,3452 1943,3467 2033,3467 2063,3487 2128,3487 2178,3537 2523,3537 2588,3537 2603,3522 2603,3407 2533,3407 2533,3487 2523,3497 2323,3497 2278,3452 2278,3412 2188,3412 2188,3442 2183,3447 2168,3462 2143,3462 2118,3437 1998,3437 1993,3432 1993,3412 2003,3397 1988,3387 1928,3387 1913,3397